# Altium PCB PCB2.PcbDoc
Units mm, origin at the board's own origin, x right, y up, seen from the top; angles counter-clockwise.
Board outline 93.28 x 88.05 mm, 2 copper layers (Top Layer, Bottom Layer); 73 components, 56 nets, 150 pads, 0 vias.
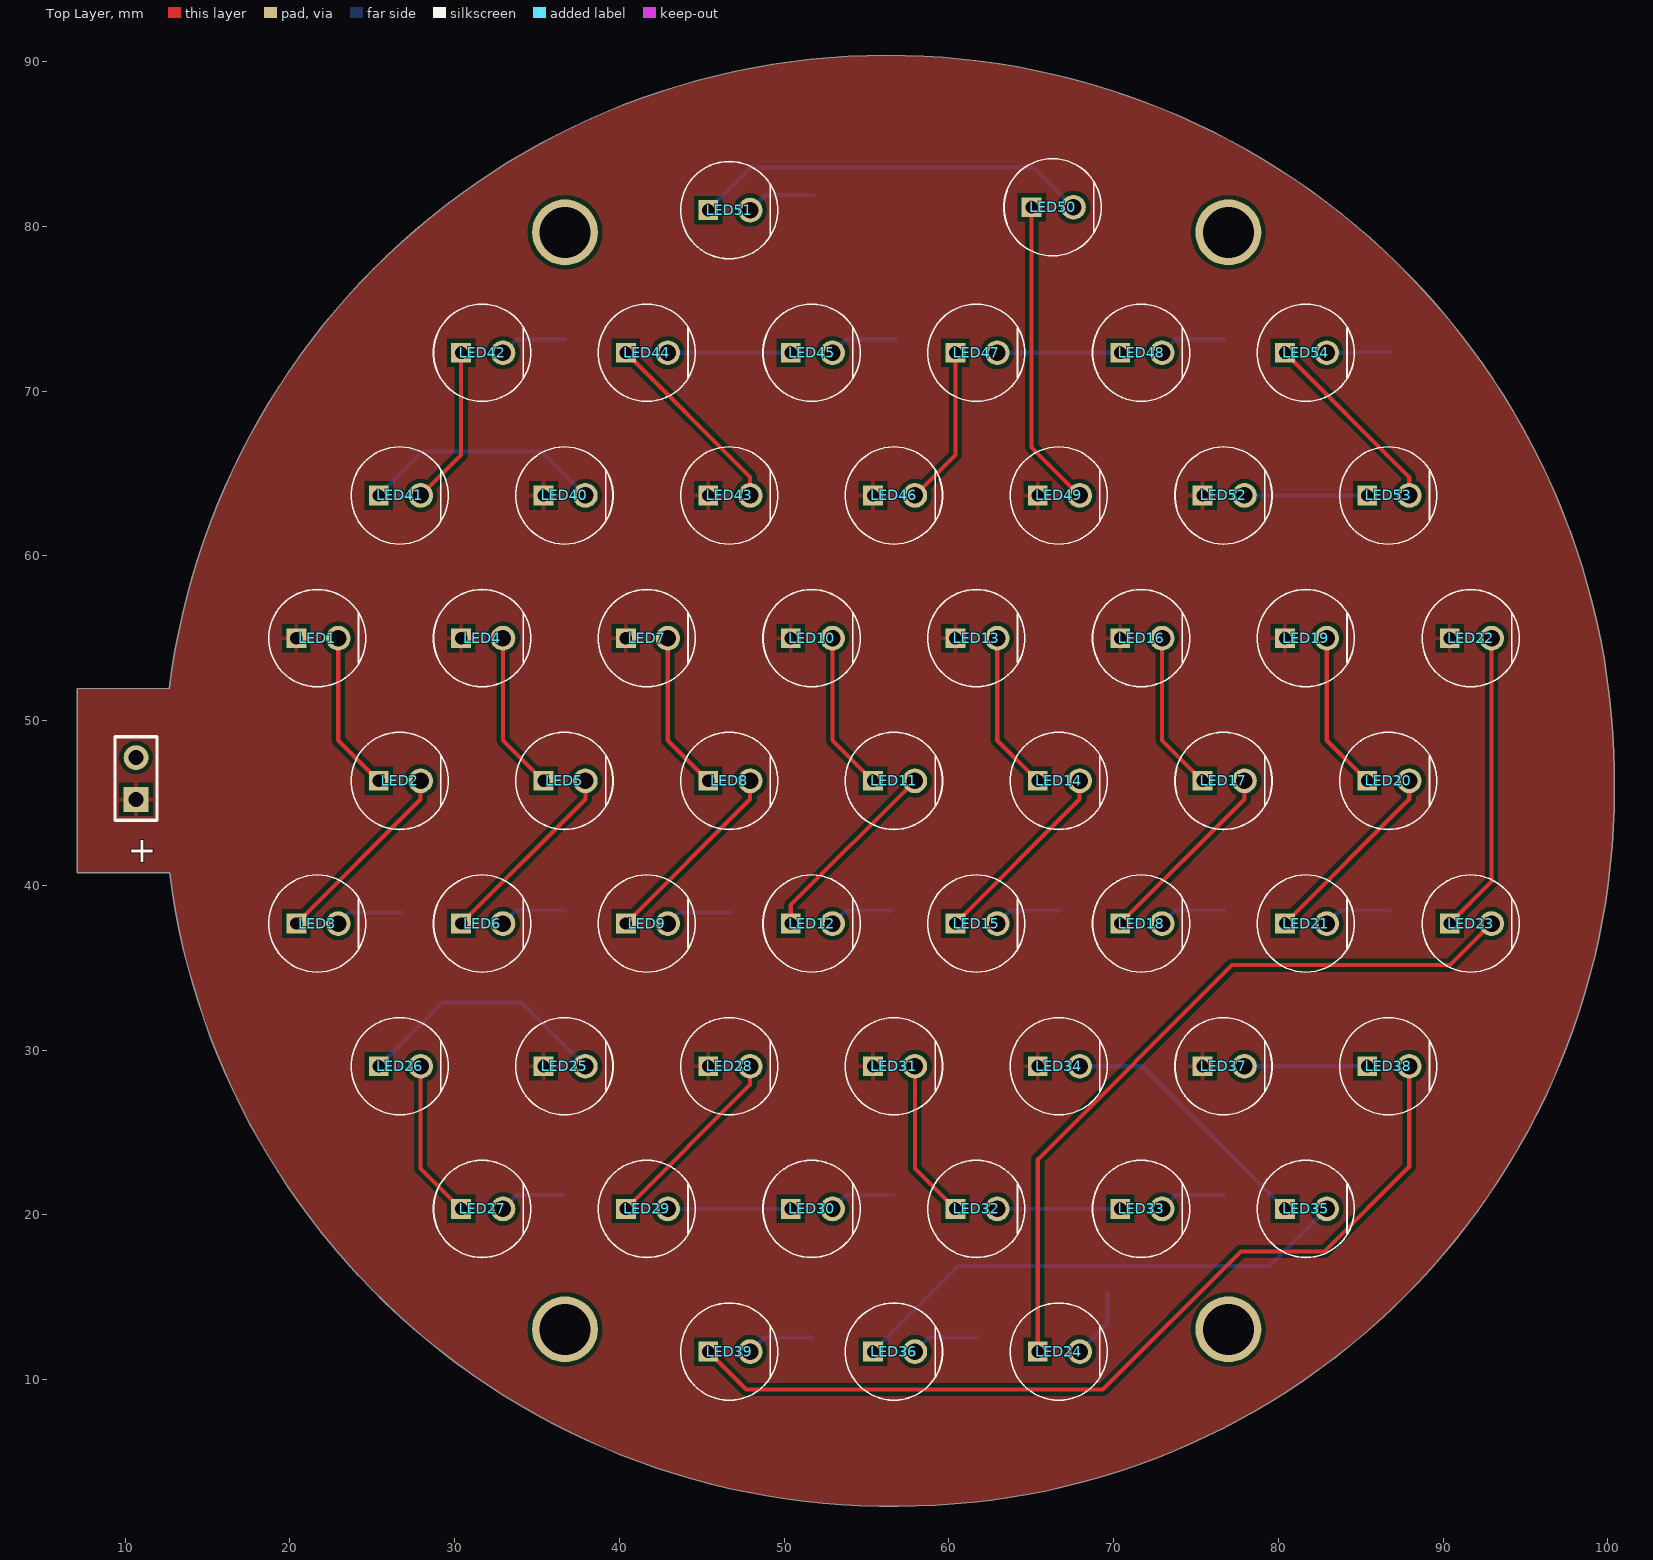
[diagram p0: Top Layer view]
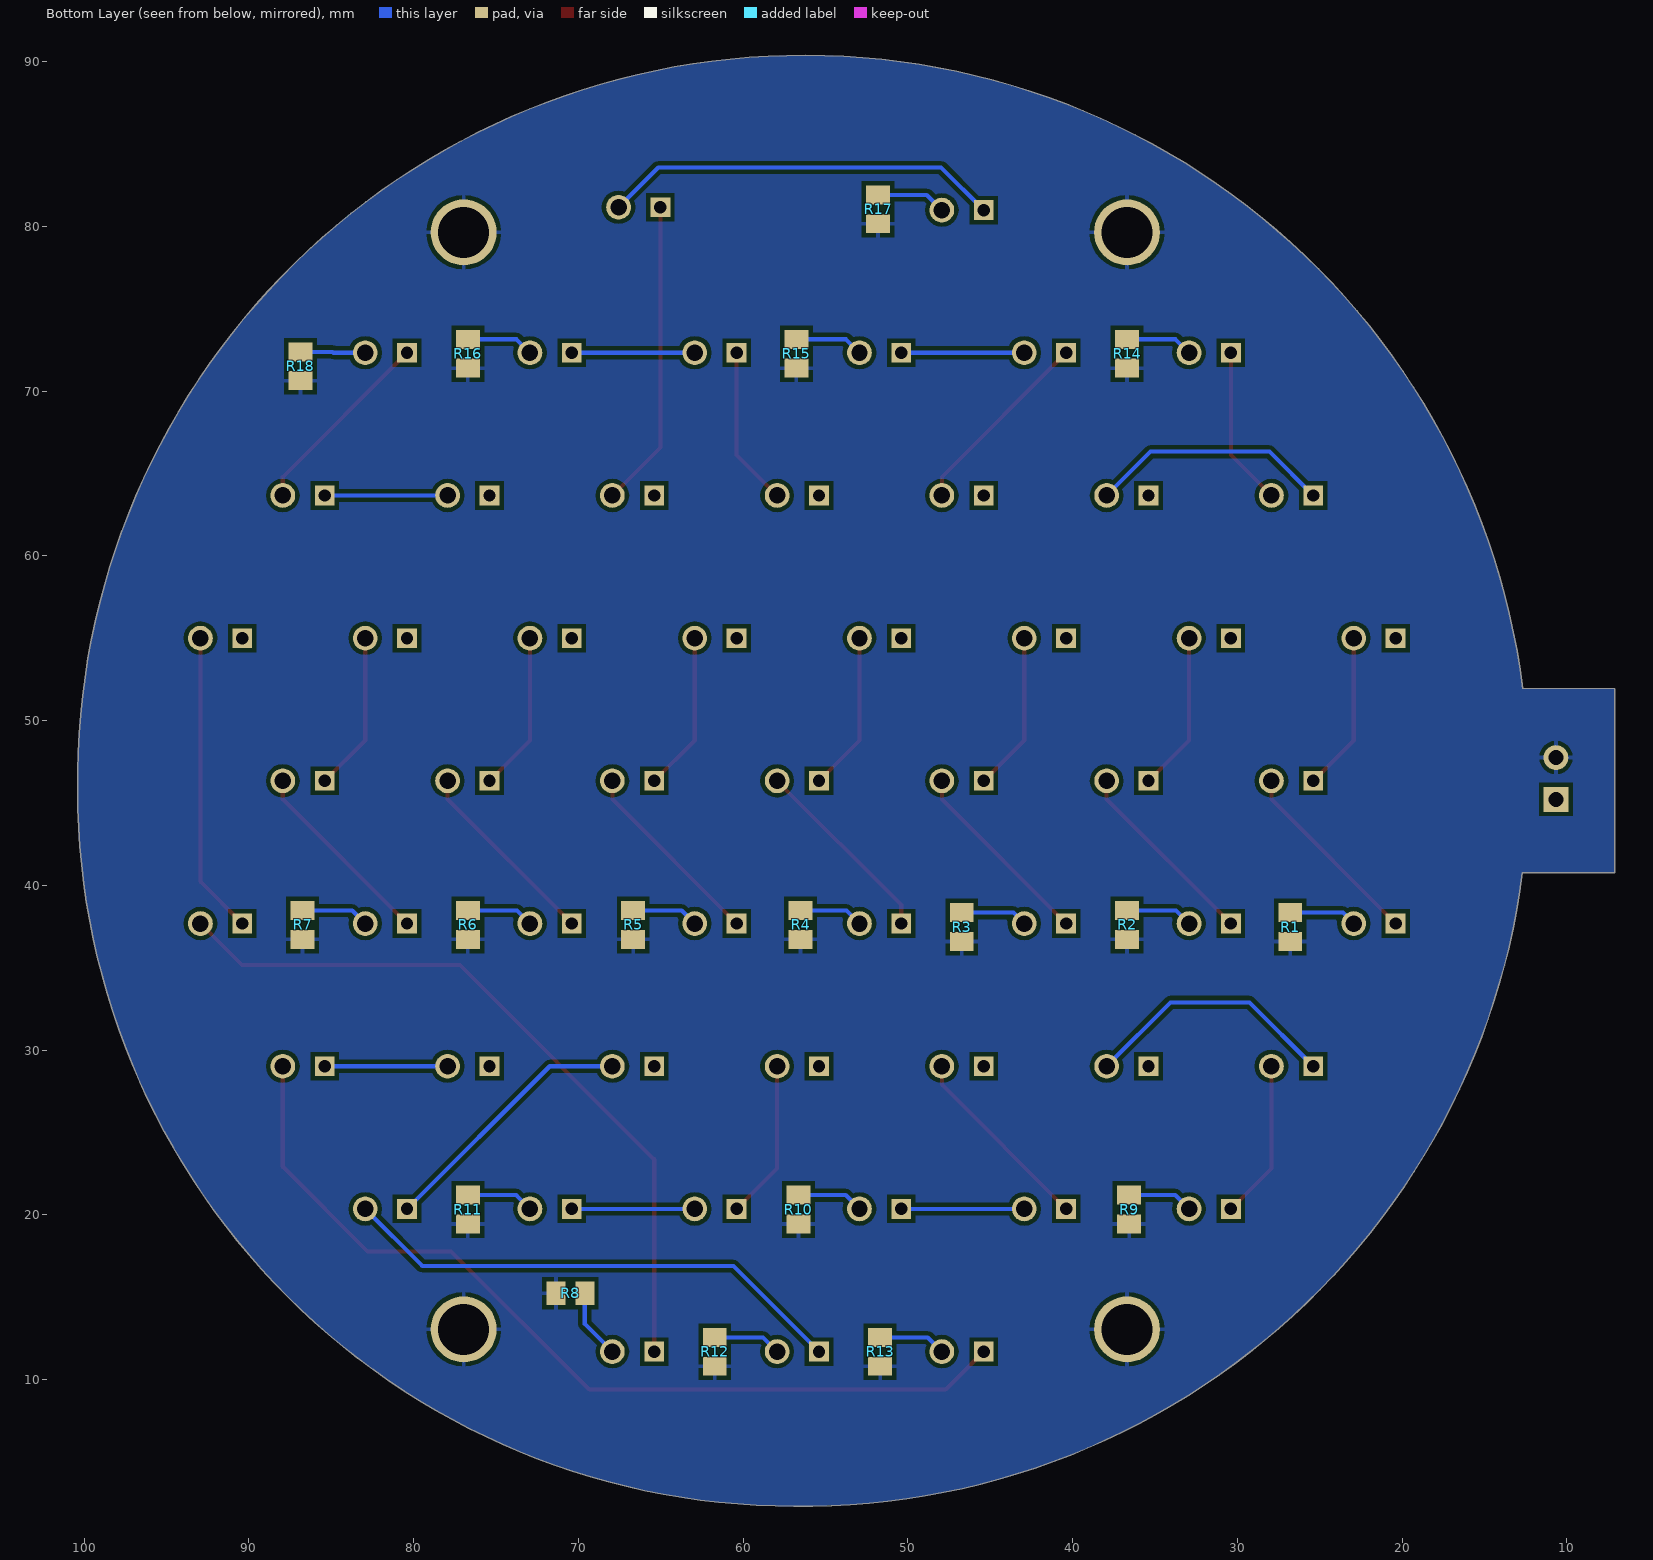
[diagram p1: Bottom Layer view, seen from below]
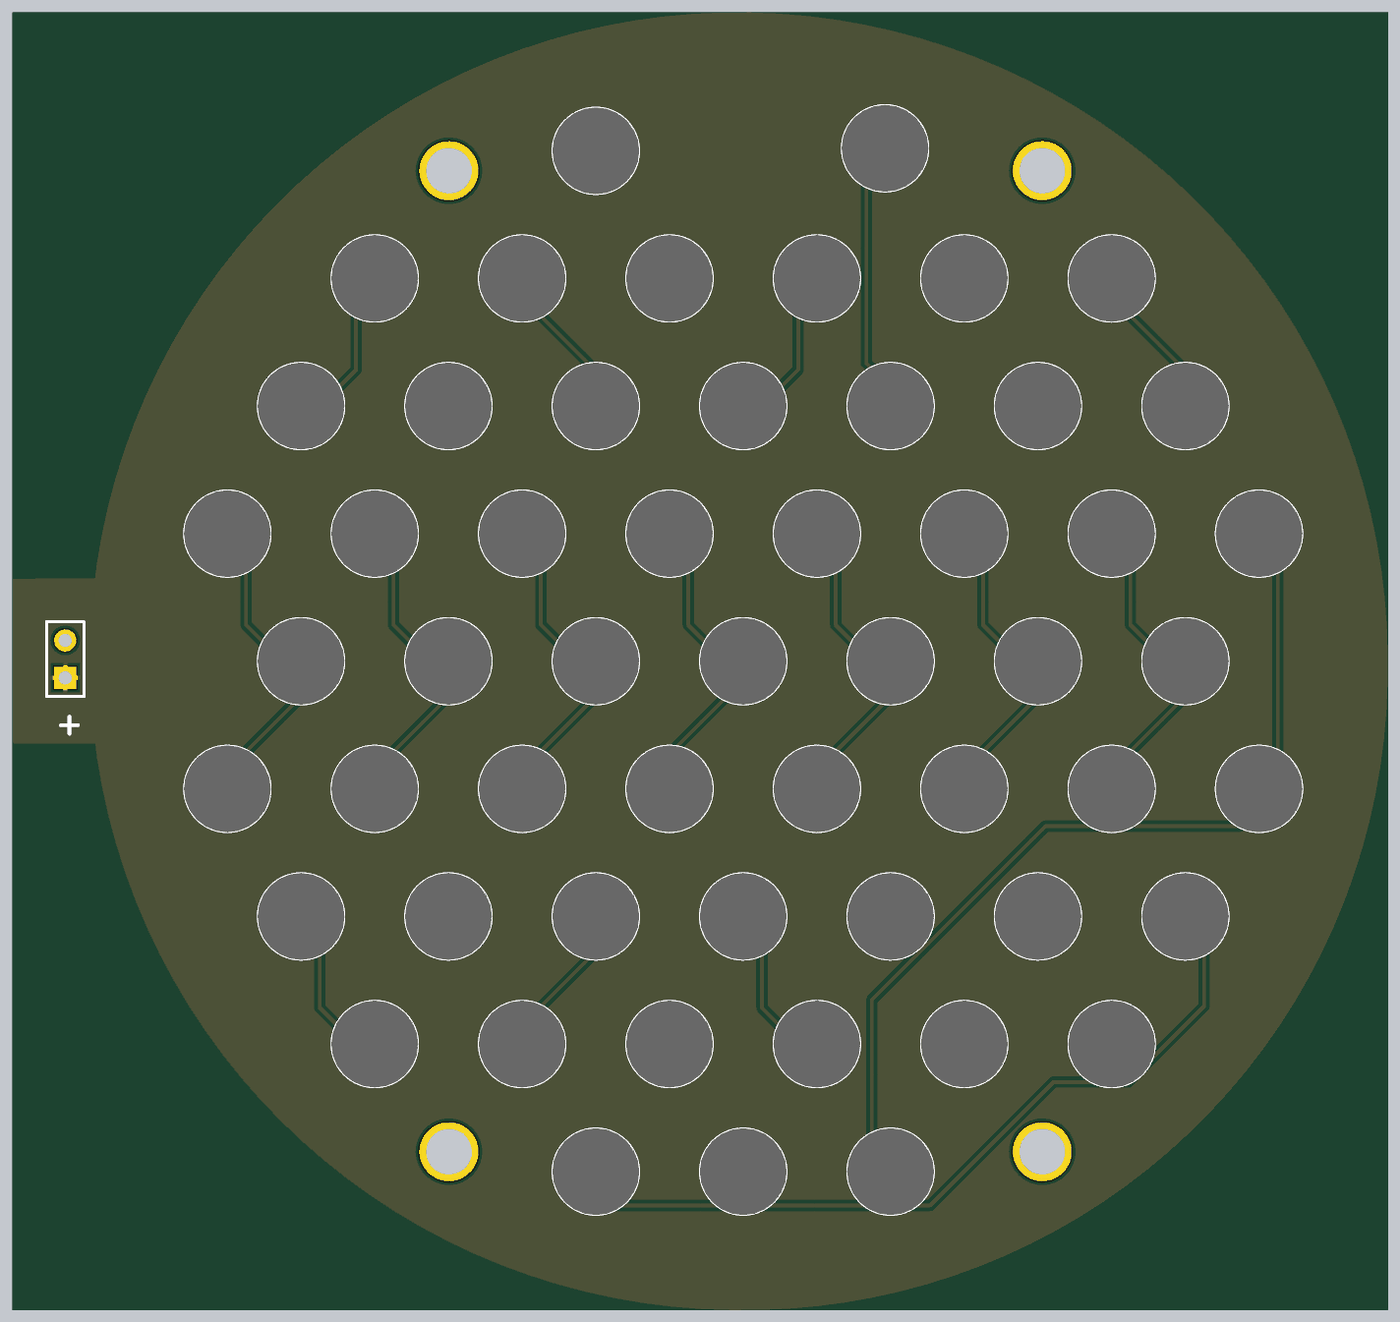
[diagram p2: 3D render of the assembled board from above, using the file's embedded part models]

## Layer stack, top to bottom
Top Solder: solder mask 0.0102, Solder Resist, Dk 3.5
Top Layer: signal copper 0.0356
Dielectric 1: dielectric 0.32, FR-4, Dk 4.8
Bottom Layer: signal copper 0.0356
Bottom Solder: solder mask 0.0102, Solder Resist, Dk 3.5

## Board outline
7.112,51.942 12.685,51.945 cw(c56.2,46.511) 56.2,90.364 cw(c56.372,46.339) 100.393,45.784 cw(c56.929,45.782) 56.928,2.317 cw(c56.372,46.339) 12.701,40.767 7.112,40.767

## Design rules (kind name [scope] priority, off if disabled: settings)
Clearance [All] p1: gap=0.254 ignorepadtopadclearanceinfootprint=FALSE except(0: Arc-Hole Track-Hole SMDPad-Hole THPad-Hole Via-Hole Fill-Hole Poly-Hole Region-Hole Text-Hole)
PolygonConnect [All] p1: connectstyle=Relief reliefconductorwidth=0.254 reliefentries=4 polygonreliefangle="90 Angle" airgapwidth=0.254
RoutingVias [All] p1: holewidth=0.711 width=1.27 viastyle="Through Hole" minholewidth=0.711 minwidth=1.27 maxholewidth=0.711 maxwidth=1.27
SolderMaskExpansion [All] p1: expansion=0.102 istentingtop=FALSE
Width [All] p1: maxlimit=0.254 minlimit=0.254 preferedwidth=0.254
30 further rules are at their usual default settings.

## Components (designator, comment, footprint, x,y, rotation, side; value= is the part's Value field where it differs from the comment)
+ "Header 2" HDR1X2 10.668,45.212 r90 top (schematic designator P1)
LED1 "151051BS04000" 151051BS04000 20.4,55 r0 top
LED2 "151051BS04000" 151051BS04000 25.4,46.34 r0 top
LED3 "151051BS04000" 151051BS04000 20.4,37.68 r0 top
LED4 "151051BS04000" 151051BS04000 30.4,55 r0 top
LED5 "151051BS04000" 151051BS04000 35.4,46.34 r0 top
LED6 "151051BS04000" 151051BS04000 30.4,37.68 r0 top
LED7 "151051BS04000" 151051BS04000 40.4,55 r0 top
LED8 "151051BS04000" 151051BS04000 45.4,46.34 r0 top
LED9 "151051BS04000" 151051BS04000 40.4,37.68 r0 top
LED10 "151051BS04000" 151051BS04000 50.4,55 r0 top
LED11 "151051BS04000" 151051BS04000 55.4,46.34 r0 top
LED12 "151051BS04000" 151051BS04000 50.4,37.68 r0 top
LED13 "151051BS04000" 151051BS04000 60.4,55 r0 top
LED14 "151051BS04000" 151051BS04000 65.4,46.34 r0 top
LED15 "151051BS04000" 151051BS04000 60.4,37.68 r0 top
LED16 "151051BS04000" 151051BS04000 70.4,55 r0 top
LED17 "151051BS04000" 151051BS04000 75.4,46.34 r0 top
LED18 "151051BS04000" 151051BS04000 70.4,37.68 r0 top
LED19 "151051BS04000" 151051BS04000 80.4,55 r0 top
LED20 "151051BS04000" 151051BS04000 85.4,46.34 r0 top
LED21 "151051BS04000" 151051BS04000 80.4,37.68 r0 top
LED22 "151051BS04000" 151051BS04000 90.4,55 r0 top
LED23 "151051BS04000" 151051BS04000 90.4,37.68 r0 top
LED24 "151051BS04000" 151051BS04000 65.4,11.7 r0 top
LED25 "151051BS04000" 151051BS04000 35.4,29.02 r0 top
LED26 "151051BS04000" 151051BS04000 25.4,29.02 r0 top
LED27 "151051BS04000" 151051BS04000 30.4,20.359 r0 top
LED28 "151051BS04000" 151051BS04000 45.4,29.02 r0 top
LED29 "151051BS04000" 151051BS04000 40.4,20.359 r0 top
LED30 "151051BS04000" 151051BS04000 50.4,20.359 r0 top
LED31 "151051BS04000" 151051BS04000 55.4,29.02 r0 top
LED32 "151051BS04000" 151051BS04000 60.4,20.359 r0 top
LED33 "151051BS04000" 151051BS04000 70.4,20.359 r0 top
LED34 "151051BS04000" 151051BS04000 65.4,29.02 r0 top
LED35 "151051BS04000" 151051BS04000 80.4,20.359 r0 top
LED36 "151051BS04000" 151051BS04000 55.4,11.7 r0 top
LED37 "151051BS04000" 151051BS04000 75.4,29.02 r0 top
LED38 "151051BS04000" 151051BS04000 85.4,29.02 r0 top
LED39 "151051BS04000" 151051BS04000 45.4,11.7 r0 top
LED40 "151051BS04000" 151051BS04000 35.4,63.66 r0 top
LED41 "151051BS04000" 151051BS04000 25.4,63.66 r0 top
LED42 "151051BS04000" 151051BS04000 30.4,72.32 r0 top
LED43 "151051BS04000" 151051BS04000 45.4,63.66 r0 top
LED44 "151051BS04000" 151051BS04000 40.4,72.32 r0 top
LED45 "151051BS04000" 151051BS04000 50.4,72.32 r0 top
LED46 "151051BS04000" 151051BS04000 55.4,63.66 r0 top
LED47 "151051BS04000" 151051BS04000 60.4,72.32 r0 top
LED48 "151051BS04000" 151051BS04000 70.4,72.32 r0 top
LED49 "151051BS04000" 151051BS04000 65.4,63.66 r0 top
LED50 "151051BS04000" 151051BS04000 65.024,81.153 r0 top
LED51 "151051BS04000" 151051BS04000 45.4,80.98 r0 top
LED52 "151051BS04000" 151051BS04000 75.4,63.66 r0 top
LED53 "151051BS04000" 151051BS04000 85.4,63.66 r0 top
LED54 "151051BS04000" 151051BS04000 80.4,72.32 r0 top
R1 "ERJ-6ENF1200V" RESC2013X70X40NL20T20 26.797,37.465 r90 bottom
R2 "ERJ-6ENF1200V" RESC2013X70X40NL20T20 36.703,37.592 r90 bottom
R3 "ERJ-6ENF1200V" RESC2013X70X40NL20T20 46.736,37.465 r90 bottom
R4 "ERJ-6ENF1200V" RESC2013X70X40NL20T20 56.515,37.592 r90 bottom
R5 "ERJ-6ENF1200V" RESC2013X70X40NL20T20 66.675,37.592 r90 bottom
R6 "ERJ-6ENF1200V" RESC2013X70X40NL20T20 76.708,37.592 r90 bottom
R7 "ERJ-6ENF1200V" RESC2013X70X40NL20T20 86.741,37.592 r90 bottom
R8 "ERJ-6ENF1200V" RESC2013X70X40NL20T20 70.485,15.24 r180 bottom
R9 "ERJ-6ENF1200V" RESC2013X70X40NL20T20 36.576,20.32 r90 bottom
R10 "ERJ-6ENF1200V" RESC2013X70X40NL20T20 56.642,20.32 r90 bottom
R11 "ERJ-6ENF1200V" RESC2013X70X40NL20T20 76.708,20.32 r90 bottom
R12 "ERJ-6ENF1200V" RESC2013X70X40NL20T20 61.722,11.684 r90 bottom
R13 "ERJ-6ENF1200V" RESC2013X70X40NL20T20 51.689,11.684 r90 bottom
R14 "ERJ-6ENF1200V" RESC2013X70X40NL20T20 36.703,72.263 r90 bottom
R15 "ERJ-6ENF1200V" RESC2013X70X40NL20T20 56.769,72.263 r90 bottom
R16 "ERJ-6ENF1200V" RESC2013X70X40NL20T20 76.708,72.263 r90 bottom
R17 "ERJ-6ENF1200V" RESC2013X70X40NL20T20 51.816,81.026 r90 bottom
R18 "ERJ-6ENF1200V" RESC2013X70X40NL20T20 86.868,71.501 r90 bottom

## Footprints (in the part's own frame and the unit in brackets; to place one, negate y for a bottom-side part, rotate by r counter-clockwise, add the part's x,y. Pads: shape width x height; smd on the part's side, far side on the other; paste and mask are expansions set on the pad)
151051BS04000 [mm]
  rect 1.2x1.2 hole 0.75: 1(0,0)
  round 1.5 hole 1: 2(2.54,0)
  silkscreen extent -1.68,-2.95 4.22,2.95, body extent -1.68,-2.95 4.22,2.95, height 9.05
HDR1X2 [mm] "Connector; Header; 2 Position"
  rect 1.5x1.5 hole 0.9: 1(0,0)
  round 1.5 hole 0.9: 2(2.54,0)
  silkscreen extent -1.27,-1.27 3.81,1.27
RESC2013X70X40NL20T20 [mm] "Chip Resistor, 2-Leads, Body 2.2x1.35mm, IPC Medium Density"
  rect 1.15x1.45 smd: 1(-0.875,0) 2(0.875,0)
  body extent -1.1,-0.72 1.1,0.72, height 0.7

## Part data
+: "Header, 2-Pin", LatestRevisionDate=17-Jul-2002, LatestRevisionNote="Re-released for DXP Platform.", Publisher="Altium Limited"
LED1 LED2 LED3 LED4 LED5 LED6 LED7 LED8 LED9 LED10 LED11 LED12 LED13 LED14 LED15 LED16 LED17 LED18 LED19 LED20 LED21 LED22 LED23 LED24 LED25 LED26 LED27 LED28 LED29 LED30 LED31 LED32 LED33 LED34 LED35 LED36 LED37 LED38 LED39 LED40 LED41 LED42 LED43 LED44 LED45 LED46 LED47 LED48 LED49 LED50 LED51 LED52 LED53 LED54: "LED", Manufacturer_Name="Wurth Elektronik", Mouser Part Number=710-151051BS04000, Datasheet Link=https://katalog.we-online.de/led/datasheet/151051BS04000.pdf, Height=8.95mm, Manufacturer_Part_Number=151051BS04000, Mouser Price/Stock=https://www.mouser.co.uk/ProductDetail/Wurth-Elektronik/151051BS04000?qs=LlUlMxKIyB3OjuZOlqaOjg%3D%3D
R1 R2 R3 R4 R5 R6 R7 R8 R9 R10 R11 R12 R13 R14 R15 R16 R17 R18: library part CMP-2001-00511-5, "Chip Resistor, 120 Ohm, +/- 1%, 0.125 W, -55 to 155 degC, 0805 (2012 Metric), RoHS, Tape and Reel", Manufacturer=Panasonic, Max Operating Temperature="155 degC", Min Operating Temperature="-55 degC", Package Quantity=5000, Voltage Rating="150 V", ComponentLink1Description="Manufacturer URL", ComponentLink1URL=http://www.panasonic.com/, ComponentLink2Description=Datasheet, ComponentLink2URL=http://industrial.panasonic.com/cdbs/www-data/pdf/RDA0000/AOA0000C86.pdf, DatasheetVersion=04/2015, Height="0.6 mm", Length="2 mm", Mount="Surface Mount", Mounting Technology="Surface Mount", PackageDescription="2-Pin Surface Mount Device, Body 2 x 1.25 mm", PackageReference=0805, Packaging="Tape and Reel", Pins=2, REACH SVHC=Yes, RoHSCompliant=true

## Free pads (board coordinates)
  round 4 hole 3.1: ""(36.703,13.051) ""(36.703,79.629) ""(76.962,13.051) ""(76.962,79.629)

## Nets (pads, with @x,y where several pads share a name; then routed paths per layer and width w, separated by ;. In a path a pad name is that pad's centre, name@x,y a point inside that pad or via, vN(x,y) a via of type N, cw(c..) or ccw(c..) an arc to the next point about the centre after c; other vN are vias at no path point)
12V: +.1 LED1.1 LED4.1 LED7.1 LED10.1 LED13.1 LED16.1 LED19.1 LED22.1 LED25.1 LED28.1 LED31.1 LED34.1 LED37.1 LED40.1 LED43.1 LED46.1 LED49.1 LED52.1
GND: +.2 pad. R1.1 R2.1 R3.1 R4.1 R5.1 R6.1 R7.1 R8.1 R9.1 R10.1 R11.1 R12.1 R13.1 R14.1 R15.1 R16.1 R17.1 R18.1
NetLED1_2: LED1.2 LED2.1 | length 9.7
  Top Layer w0.254: LED1.2 22.94,48.8 LED2.1
NetLED2_2: LED2.2 LED3.1 | length 11.8
  Top Layer w0.254: LED3.1 27.94,45.22 LED2.2
NetLED3_2: LED3.2 R1.2 | length 4.1
  Bottom Layer w0.254: LED3.2 23.6,38.34 R1.2
NetLED4_2: LED4.2 LED5.1 | length 9.7
  Top Layer w0.254: LED4.2 32.94,48.8 LED5.1
NetLED5_2: LED5.2 LED6.1 | length 11.8
  Top Layer w0.254: LED6.1 37.94,45.22 LED5.2
NetLED6_2: LED6.2 R2.2 | length 4.1
  Bottom Layer w0.254: LED6.2 33.727,38.467 R2.2
NetLED7_2: LED7.2 LED8.1 | length 9.7
  Top Layer w0.254: LED7.2 42.94,48.8 LED8.1
NetLED8_2: LED8.2 LED9.1 | length 11.8
  Top Layer w0.254: LED9.1 47.94,45.22 LED8.2
NetLED9_2: LED9.2 R3.2 | length 4.1
  Bottom Layer w0.254: LED9.2 43.6,38.34 R3.2
NetLED10_2: LED10.2 LED11.1 | length 9.7
  Top Layer w0.254: LED10.2 52.94,48.8 LED11.1
NetLED11_2: LED11.2 LED12.1 | length 11.8
  Top Layer w0.254: LED12.1 50.4,38.8 LED11.2
NetLED12_2: LED12.2 R4.2 | length 3.9
  Bottom Layer w0.254: LED12.2 53.727,38.467 R4.2
NetLED13_2: LED13.2 LED14.1 | length 9.7
  Top Layer w0.254: LED13.2 62.94,48.8 LED14.1
NetLED14_2: LED14.2 LED15.1 | length 11.8
  Top Layer w0.254: LED15.1 67.94,45.22 LED14.2
NetLED15_2: LED15.2 R5.2 | length 4.1
  Bottom Layer w0.254: LED15.2 63.727,38.467 R5.2
NetLED16_2: LED16.2 LED17.1 | length 9.7
  Top Layer w0.254: LED16.2 72.94,48.8 LED17.1
NetLED17_2: LED17.2 LED18.1 | length 11.8
  Top Layer w0.254: LED18.1 77.94,45.22 LED17.2
NetLED18_2: LED18.2 R6.2 | length 4.1
  Bottom Layer w0.254: LED18.2 73.727,38.467 R6.2
NetLED19_2: LED19.2 LED20.1 | length 9.7
  Top Layer w0.254: LED19.2 82.94,48.8 LED20.1
NetLED20_2: LED20.2 LED21.1 | length 11.8
  Top Layer w0.254: LED21.1 87.94,45.22 LED20.2
NetLED21_2: LED21.2 R7.2 | length 4.1
  Bottom Layer w0.254: LED21.2 83.727,38.467 R7.2
NetLED22_2: LED22.2 LED23.1 | length 18.4
  Top Layer w0.254: LED23.1 92.94,40.22 LED22.2
NetLED23_2: LED23.2 LED24.1 | length 45.1
  Top Layer w0.254: LED24.1 65.4,23.368 77.186,35.154 90.414,35.154 LED23.2
NetLED24_2: LED24.2 R8.2 | length 4.2
  Bottom Layer w0.254: LED24.2 69.61,13.37 R8.2
NetLED25_2: LED25.2 LED26.1 | length 15.7
  Bottom Layer w0.254: LED26.1 29.273,32.893 34.067,32.893 LED25.2
NetLED26_2: LED26.2 LED27.1 | length 9.7
  Top Layer w0.254: LED26.2 27.94,22.819 LED27.1
NetLED27_2: LED27.2 R9.2 | length 4
  Bottom Layer w0.254: LED27.2 33.776,21.195 R9.2
NetLED28_2: LED28.2 LED29.1 | length 11.8
  Top Layer w0.254: LED29.1 47.94,27.899 LED28.2
NetLED29_2: LED29.2 LED30.1 | length 7.5
  Bottom Layer w0.254: LED29.2 LED30.1
NetLED30_2: LED30.2 R10.2 | length 4
  Bottom Layer w0.254: LED30.2 53.776,21.195 R10.2
NetLED31_2: LED31.2 LED32.1 | length 9.7
  Top Layer w0.254: LED31.2 57.94,22.819 LED32.1
NetLED32_2: LED32.2 LED33.1 | length 7.5
  Bottom Layer w0.254: LED32.2 LED33.1
NetLED33_2: LED33.2 R11.2 | length 4.1
  Bottom Layer w0.254: LED33.2 73.776,21.195 R11.2
NetLED34_2: LED34.2 LED35.1 | length 16
  Bottom Layer w0.254: LED34.2 71.739,29.02 LED35.1
NetLED35_2: LED35.2 LED36.1 | length 31.1
  Bottom Layer w0.254: LED36.1 60.591,16.891 79.472,16.891 LED35.2
NetLED36_2: LED36.2 R12.2 | length 4.1
  Bottom Layer w0.254: LED36.2 58.799,12.559 R12.2
NetLED37_2: LED37.2 LED38.1 | length 7.5
  Bottom Layer w0.254: LED37.2 LED38.1
NetLED38_2: LED38.2 LED39.1 | length 55.2
  Top Layer w0.254: LED39.1 47.702,9.398 69.342,9.398 77.724,17.78 82.804,17.78 87.94,22.916 LED38.2
NetLED39_2: LED39.2 R13.2 | length 4.1
  Bottom Layer w0.254: LED39.2 48.799,12.559 R13.2
NetLED40_2: LED40.2 LED41.1 | length 14.7
  Bottom Layer w0.254: LED41.1 28.059,66.319 35.281,66.319 LED40.2
NetLED41_2: LED41.2 LED42.1 | length 9.7
  Top Layer w0.254: LED41.2 30.4,66.12 LED42.1
NetLED42_2: LED42.2 R14.2 | length 4.1
  Bottom Layer w0.254: LED42.2 33.758,73.138 R14.2
NetLED43_2: LED43.2 LED44.1 | length 11.8
  Top Layer w0.254: LED44.1 47.94,64.78 LED43.2
NetLED44_2: LED44.2 LED45.1 | length 7.5
  Bottom Layer w0.254: LED44.2 LED45.1
NetLED45_2: LED45.2 R15.2 | length 4.2
  Bottom Layer w0.254: LED45.2 53.758,73.138 R15.2
NetLED46_2: LED46.2 LED47.1 | length 9.7
  Top Layer w0.254: LED46.2 60.4,66.12 LED47.1
NetLED47_2: LED47.2 LED48.1 | length 7.5
  Bottom Layer w0.254: LED47.2 LED48.1
NetLED48_2: LED48.2 R16.2 | length 4.1
  Bottom Layer w0.254: LED48.2 73.758,73.138 R16.2
NetLED49_2: LED49.2 LED50.1 | length 18.7
  Top Layer w0.254: LED50.1 65.024,66.576 LED49.2
NetLED50_2: LED50.2 LED51.1 | length 24.2
  Bottom Layer w0.254: LED51.1 47.986,83.566 65.151,83.566 LED50.2
NetLED51_2: LED51.2 R17.2 | length 4.3
  Bottom Layer w0.254: LED51.2 48.861,81.901 R17.2
NetLED52_2: LED52.2 LED53.1 | length 7.5
  Bottom Layer w0.254: LED52.2 LED53.1
NetLED53_2: LED53.2 LED54.1 | length 11.8
  Top Layer w0.254: LED54.1 87.94,64.78 LED53.2
NetLED54_2: LED54.2 R18.2 | length 4
  Bottom Layer w0.254: LED54.2 84.861,72.32 84.917,72.376 R18.2

## Polygon pours and split planes (outlines as drawn)
12V on Top Layer "12V_L01_P000" (solid, pour order 0): 7.112,51.942 12.685,51.945 cw(c56.2,46.511) 56.2,90.364 cw(c56.372,46.339) 100.393,45.784 cw(c56.929,45.782) 56.928,2.317 cw(c56.372,46.339) 12.701,40.767 7.112,40.767
GND on Bottom Layer "GND_L02_P001" (solid, pour order 1): 7.112,51.942 12.685,51.945 cw(c56.2,46.511) 56.2,90.364 cw(c56.372,46.339) 100.393,45.784 cw(c56.929,45.782) 56.928,2.317 cw(c56.372,46.339) 12.701,40.767 7.112,40.767